# EAGLE board TestBoard (EAGLE 9.1.3)
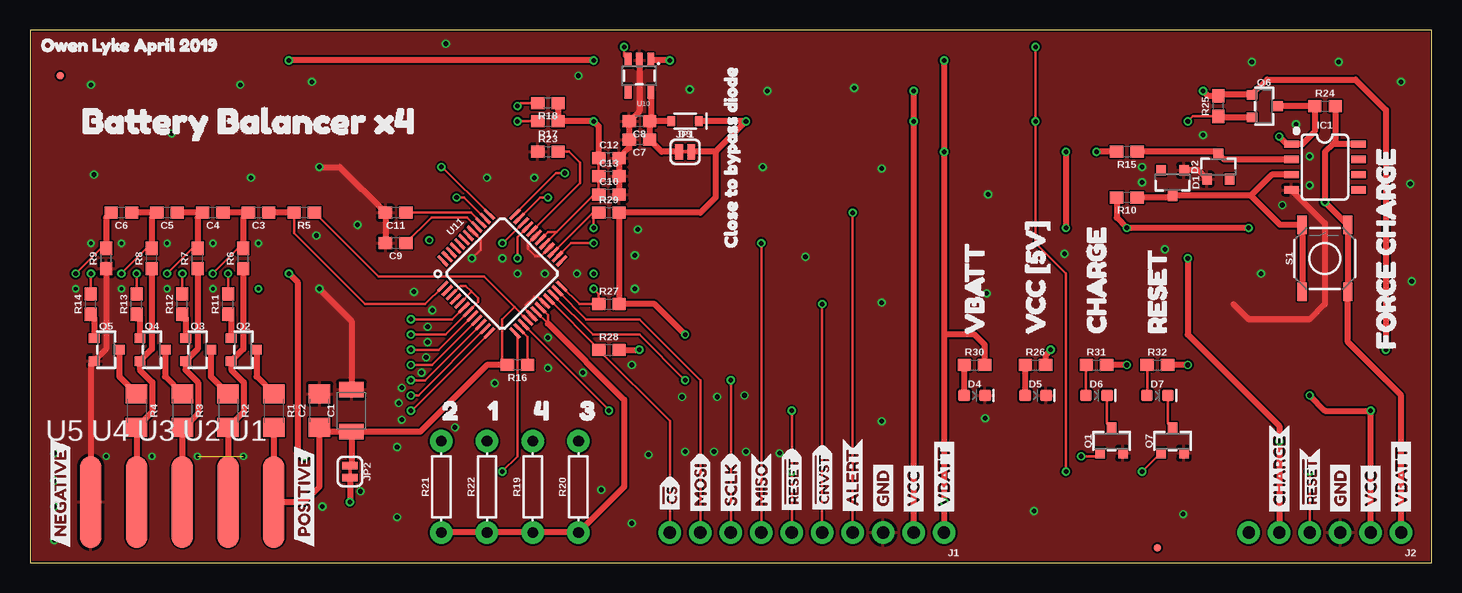
[diagram p0: board, top side]
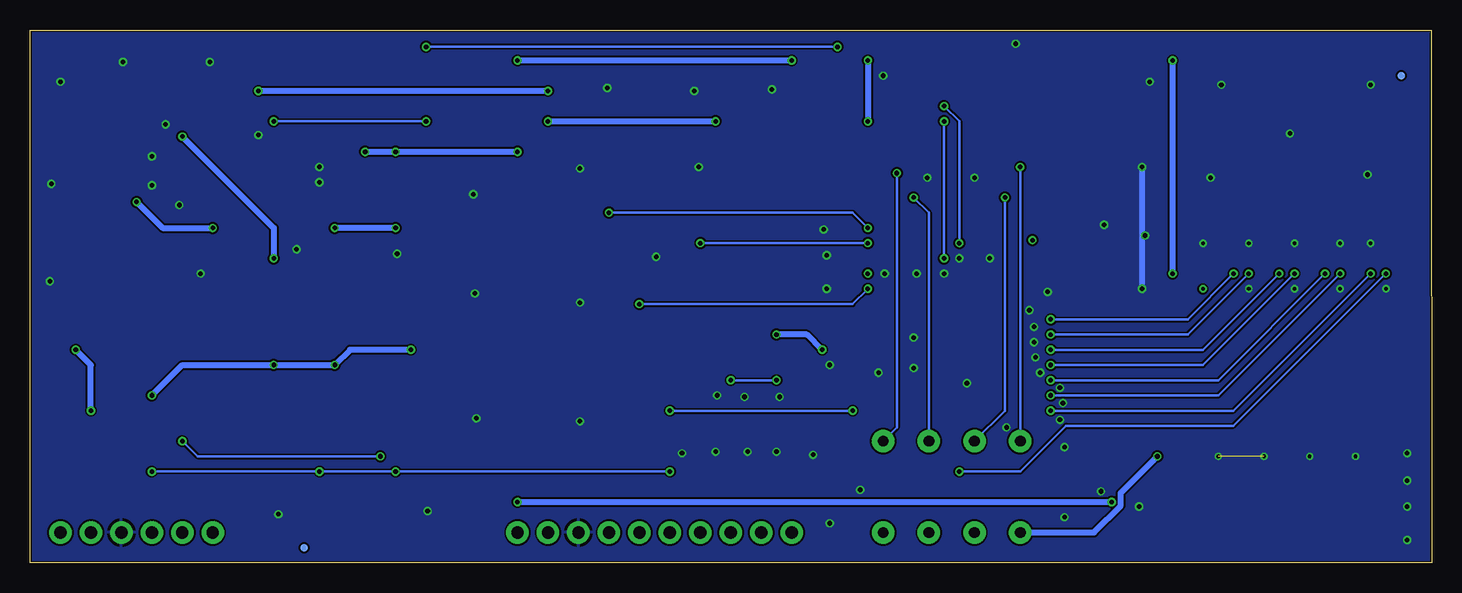
[diagram p1: board, bottom side, seen from below]

Size 116.84 x 44.45 mm. Coordinates in mm from the lower left corner, seen from the top.
Outline: 0,0 116.84,0 116.84,44.45 0.01,44.45 0,0
Copper layers (1*16): Top 0.035mm / dielectric 1.5mm / Bottom 0.035mm
Design rules "SparkFun-2-layer-PCBWay-LIMIT": minimum track width 6mil, minimum drill 0.3mm, track to track 6mil, track to pad 6mil, pad to pad 6mil, via to via 6mil, smd to smd 6mil, copper to edge 6mil, drill to drill 6mil, minimum pad ring 6mil, minimum via ring 6mil, stop-mask expansion 4mil, vias tented up to drill 25mil, thermal gap 10mil

## Footprints (pad centres in the part's own frame; a part is rotated, then mirrored left to right if it is on the bottom)
1210 = smd 1.27 x 2.06: 1 -1.755,0; 2 1.755,0
1206 = smd 1.6 x 1.8: 1 -1.4,0; 2 1.4,0
0603 = smd 1.1 x 1: 1 -0.85,0; 2 0.85,0
SOT23-3 = smd 0.8 x 0.9: 1 -0.95,-1; 2 0.95,-1; 3 0,1.1
SOD-323 = smd 0.63 x 0.83: A 1.15,0; C -1.15,0
LED-0603 = smd 1 x 1: A -0.877,0; C 0.877,0
FIDUCIAL-MICRO = smd 0.635 x 0.635: 1 0,0
SO08 = smd 0.6 x 1.2: 1 -1.905,-2.8; 2 -0.635,-2.8; 3 0.635,-2.8; 4 1.905,-2.8; 5 1.905,2.8; 6 0.635,2.8; 7 -0.635,2.8; 8 -1.905,2.8
1X10_NO_SILK = drill 1.016 pad 1.88: 1 0,0; 2 2.54,0; 3 5.08,0; 4 7.62,0; 5 10.16,0; 6 12.7,0; 7 15.24,0; 8 17.78,0; 9 20.32,0; 10 22.86,0
1X06_NO_SILK = drill 1.016 pad 1.88: 1 0,0; 2 2.54,0; 3 5.08,0; 4 7.62,0; 5 10.16,0; 6 12.7,0
SMT-JUMPER_2_NC_TRACE_SILK = smd 0.635 x 1.27: 1 -0.508,0; 2 0.508,0
AXIAL-0.3 = drill 0.9 pad 1.88: P$1 -3.81,0; P$2 3.81,0
TACTILE_SWITCH_SMD_5.2MM = smd 1.524 x 0.762: 1 -2.794,1.905; 2 2.794,1.905; 3 -2.794,-1.905; 4 2.794,-1.905
1X01_SMD_0.1IN = smd 1.778 x 7.62: 1 0,0
SOT23-5 = smd 0.55 x 1.2: 1 -0.95,-1.3; 2 0,-1.3; 3 0.95,-1.3; 4 0.95,1.3; 5 -0.95,1.3
LQFP-48 = smd 0.254 x 1.143: 1 -2.75,-4.25; 2 -2.25,-4.25; 3 -1.75,-4.25; 4 -1.25,-4.25; 5 -0.75,-4.25; 6 -0.25,-4.25; 7 0.25,-4.25; 8 0.75,-4.25; 9 1.25,-4.25; 10 1.75,-4.25; 11 2.25,-4.25; 12 2.75,-4.25; 25 2.75,4.25; 26 2.25,4.25; 27 1.75,4.25; 28 1.25,4.25; 29 0.75,4.25; 30 0.25,4.25; 31 -0.25,4.25; 32 -0.75,4.25; 33 -1.25,4.25; 34 -1.75,4.25; 35 -2.25,4.25; 36 -2.75,4.25 | smd 1.143 x 0.254: 13 4.25,-2.75; 14 4.25,-2.25; 15 4.25,-1.75; 16 4.25,-1.25; 17 4.25,-0.75; 18 4.25,-0.25; 19 4.25,0.25; 20 4.25,0.75; 21 4.25,1.25; 22 4.25,1.75; 23 4.25,2.25; 24 4.25,2.75; 37 -4.25,2.75; 38 -4.25,2.25; 39 -4.25,1.75; 40 -4.25,1.25; 41 -4.25,0.75; 42 -4.25,0.25; 43 -4.25,-0.25; 44 -4.25,-0.75; 45 -4.25,-1.25; 46 -4.25,-1.75; 47 -4.25,-2.25; 48 -4.25,-2.75

## Placement (x,y rotation side)
C1  10uF  [1210]  26.8,12.7 90 top
C2  1.0uF  [1206]  24.13,12.7 90 top
C3  0.1uF  [0603]  19.05,29.21 180 top
C4  0.1uF  [0603]  15.24,29.21 180 top
C5  0.1uF  [0603]  11.43,29.21 180 top
C6  0.1uF  [0603]  7.62,29.21 180 top
C7  1.0uF  [0603]  50.8,35.31 180 top
C8  0.1uF  [0603]  50.8,36.83 180 top
C9  1.0uF  [0603]  30.48,26.67 180 top
C10  0.1uF  [0603]  48.26,30.73 0 top
C11  1.0uF  [0603]  30.48,29.21 180 top
C12  0.1uF  [0603]  48.26,33.78 0 top
C13  1.0uF  [0603]  48.26,32.26 0 top
D1  MATCH  [SOT23-3]  95.25,31.75 180 top
D2  TH  [SOT23-3]  99.06,33.02 0 top
D3  3A/10V/280mV  [SOD-323]  54.61,36.83 180 top
D4  BLUE  [LED-0603]  78.74,13.97 0 top
D5  BLUE  [LED-0603]  83.82,13.97 0 top
D6  BLUE  [LED-0603]  88.9,13.97 0 top
D7  BLUE  [LED-0603]  93.98,13.97 0 top
FD1  FIDUCIALUFIDUCIAL  [FIDUCIAL-MICRO]  2.54,40.64 0 top
FD2  FIDUCIALUFIDUCIAL  [FIDUCIAL-MICRO]  2.54,40.64 0 bottom
FD3  FIDUCIALUFIDUCIAL  [FIDUCIAL-MICRO]  93.98,1.27 0 top
FD4  FIDUCIALUFIDUCIAL  [FIDUCIAL-MICRO]  93.98,1.27 0 bottom
FRAME1  FRAME-LEDGER  [CREATIVE_COMMONS]  -80.01,31.75 0 top  (outside the outline)
IC1  OP-AMP  [SO08]  107.95,33.02 270 top
J1  [1X10_NO_SILK]  76.2,2.54 180 top
J2  [1X06_NO_SILK]  114.3,2.54 180 top
JP1  VCC  [SMT-JUMPER_2_NC_TRACE_SILK]  54.61,34.29 0 top
JP2  RPP_BYP  [SMT-JUMPER_2_NC_TRACE_SILK]  26.67,7.62 270 top
Q1  [SOT23-3]  90.17,10.16 0 top
Q2  [SOT23-3]  17.78,17.78 270 top
Q3  [SOT23-3]  13.97,17.78 270 top
Q4  [SOT23-3]  10.16,17.78 270 top
Q5  [SOT23-3]  6.35,17.78 270 top
Q6  [SOT23-3]  102.87,38.1 270 top
Q7  [SOT23-3]  95.25,10.16 0 top
R1  10  [1206]  20.32,12.7 270 top
R2  10  [1206]  16.51,12.7 270 top
R3  10  [1206]  12.7,12.7 270 top
R4  10  [1206]  8.89,12.7 270 top
R5  10k  [0603]  22.86,29.21 180 top
R6  10k  [0603]  17.78,25.4 90 top
R7  10k  [0603]  13.97,25.4 90 top
R8  10k  [0603]  10.16,25.4 90 top
R9  10k  [0603]  6.35,25.4 90 top
R10  1M  [0603]  91.44,30.48 180 top
R11  10k  [0603]  16.51,21.59 90 top
R12  10k  [0603]  12.7,21.59 90 top
R13  10k  [0603]  8.89,21.59 90 top
R14  10k  [0603]  5.08,21.59 90 top
R15  330k  [0603]  91.44,34.29 180 top
R16  10k  [0603]  40.64,16.51 180 top
R17  10k  [0603]  43.18,36.83 180 top
R18  10k  [0603]  43.18,38.35 180 top
R19  DNP  [AXIAL-0.3]  41.91,6.35 90 top
R20  DNP  [AXIAL-0.3]  45.72,6.35 90 top
R21  DNP  [AXIAL-0.3]  34.29,6.35 90 top
R22  DNP  [AXIAL-0.3]  38.1,6.35 90 top
R23  10k  [0603]  43.18,34.29 0 top
R24  10k  [0603]  107.95,38.1 0 top
R25  10k  [0603]  99.06,38.1 90 top
R26  1k  [0603]  83.82,16.51 0 top
R27  10k  [0603]  48.26,21.59 0 top
R28  10k  [0603]  48.26,17.78 0 top
R29  10k  [0603]  48.26,29.21 0 top
R30  10k  [0603]  78.74,16.51 0 top
R31  1k  [0603]  88.9,16.51 0 top
R32  1k  [0603]  93.98,16.51 0 top
S1  Force Charge  [TACTILE_SWITCH_SMD_5.2MM]  107.95,25.4 90 top
U1  TAP_POINT  [1X01_SMD_0.1IN]  20.32,5.08 0 top
U2  TAP_POINT  [1X01_SMD_0.1IN]  16.51,5.08 0 top
U3  TAP_POINT  [1X01_SMD_0.1IN]  12.7,5.08 0 top
U4  TAP_POINT  [1X01_SMD_0.1IN]  8.89,5.08 0 top
U5  TAP_POINT  [1X01_SMD_0.1IN]  5.08,5.08 0 top
U10  MCP1755  [SOT23-5]  50.8,40.64 180 top
U11  AD7280A  [LQFP-48]  39.37,24.13 315 top
U$1  [#CNVST5]  66.04,3.81 90 top
U$2  [#CS3]  53.34,3.81 90 top
U$3  [#RESET4]  63.5,3.81 90 top
U$4  [#RESET11]  106.68,3.81 90 top
U$5  [ALERT6]  68.58,3.81 90 top
U$6  [GND7]  71.12,3.81 90 top
U$7  [GND7]  109.22,3.81 90 top
U$8  [CHARGE10]  104.14,3.81 90 top
U$9  [MISO2]  60.96,3.81 90 top
U$10  [MOSI1]  55.88,3.81 90 top
U$11  [SCLK0]  58.42,3.81 90 top
U$12  [VCC8]  73.66,3.81 90 top
U$13  [VBATT9]  76.2,3.81 90 top
U$14  [VBATT9]  114.3,3.81 90 top
U$15  [VCC8]  111.76,3.81 90 top
U$16  [CLOSE_TO_BYPASS_DIODE12]  58.42,25.4 90 top
U$17  [NEGATIVE0]  2.54,1.27 90 top
U$18  [POSITIVE1]  22.86,1.27 90 top
U$19  [CHARGE14]  88.9,17.78 90 top
U$20  [RESET15]  93.98,17.78 90 top
U$21  [VBATT12]  78.74,17.78 90 top
U$22  [VCC_#5V#13]  83.82,17.78 90 top
U$23  [116]  36.83,12.7 0 top
U$24  [217]  33.02,12.7 0 top
U$25  [318]  44.45,12.7 0 top
U$26  [419]  40.64,12.7 0 top
U$27  [OWEN_LYKE_APRIL_201921]  0,43.18 0 top
U$28  [FORCE_CHARGE20]  113.03,16.51 90 top
U$29  [BATTERY_BALANCER_X421]  2.54,36.83 0 top

## Library data of the parts
C1 = SparkFun-Capacitors; PROD_ID: CAP-09824
C2 = SparkFun-Capacitors; PROD_ID: CAP-09822
C3-C6 C8 C10 C12 = SparkFun-Capacitors; PROD_ID: CAP-08604
C7 C9 C11 C13 = SparkFun-Capacitors; PROD_ID: CAP-13930
D1 D2 = SparkFun-DiscreteSemi; PROD_ID: DIO-14123
D3 = SparkFun-DiscreteSemi; PROD_ID: DIO-14072
D4-D7 = SparkFun-LED; PROD_ID: DIO-08575
FD1-FD4 FRAME1 = SparkFun-Aesthetics
IC1 = SparkFun-IC-Amplifiers; PROD_ID: NA-XXXXX
J1 = SparkFun-Connectors; PROD_ID: CONN-11563
J2 = SparkFun-Connectors
JP1 JP2 = SparkFun-Jumpers
Q1-Q7 = MTAES_V2_UniqueParts
R1-R4 = SparkFun-Resistors; PROD_ID: RES-08705
R5-R9 R11-R14 R16-R18 R23-R25 R27-R30 = SparkFun-Resistors; PROD_ID: RES-00824
R10 = SparkFun-Resistors; PROD_ID: RES-07868
R15 = SparkFun-Resistors; PROD_ID: RES-08968
R19-R22 U1-U5 U10 U11 = BBLib
R26 R31 R32 = SparkFun-Resistors; PROD_ID: RES-07856
S1 = SparkFun-Switches; PROD_ID: SWCH-14139
U$1-U$16 U$19-U$29 = buzzard_labels_test
U$17 U$18 = buzzard_labels_0

## Nets
5V: C7.1 C8.1 D3.A JP1.1 U10.5
!CS: J1.10 R28.1 U11.21
!CVNST: J1.5 R27.1 U11.24
ALERT: J1.4 R29.1 U11.27
CHARGE: IC1.1 J2.5 Q1.1 Q6.3 R24.1
GND: C1.2 C2.2 C7.2 C8.2 C9.2 C10.2 C11.2 C12.2 C13.2 D1.1 D2.1 D4.C D5.C IC1.4 J1.3 J2.3 Q1.2 Q5.2 Q7.2 R9.1 R23.1 U5.1 U10.2 U11.17 U11.20 U11.28 U11.31 U11.41
MISO: J1.7 U11.26
MOSI: J1.9 U11.23
N$2: D7.C Q7.3
N$3: D6.C Q1.3
N$5: Q2.3 R1.1
N$6: Q2.2 R2.2 R6.1 U2.1
N$7: Q3.3 R2.1
N$8: Q3.2 R3.2 R7.1 U3.1
N$9: Q4.3 R3.1
N$10: Q4.2 R4.2 R8.1 U4.1
N$11: Q5.3 R4.1
N$12: Q2.1 R11.1
N$13: Q3.1 R12.1
N$14: R16.1 U11.14
N$15: Q4.1 R13.1
N$16: Q5.1 R14.1
N$17: C6.2 R9.2 U11.13
N$18: R14.2 U11.12
N$19: C5.2 C6.1 R8.2 U11.11
N$20: R13.2 U11.10
N$21: C4.2 C5.1 R7.2 U11.9
N$22: R12.2 U11.8
N$23: R22.P$2 U11.38
N$24: R11.2 U11.6
N$25: C3.1 R5.2 U11.1
N$26: C3.2 C4.1 R6.2 U11.3 U11.5 U11.7
N$27: C9.1 U11.40
N$28: R17.2 U11.33
N$29: C11.1 U11.39
N$30: R23.2 U11.32
N$31: R18.2 U11.34
N$32: R21.P$2 U11.37
N$33: R20.P$2 U11.36
N$34: R19.P$2 U11.35
N$35: D4.A R30.1
N$36: J2.6
N$37: D5.A R26.1
N$38: D6.A R31.1
N$39: D7.A R32.1
N$40: D1.3 IC1.3 R10.1 S1.1 S1.2
N$41: D2.3 IC1.2 R15.1
RESET: J1.6 J2.4 Q6.2 Q7.1 R25.1 U10.3 U11.15
SCLK: J1.8 U11.22
V_BATT: IC1.8 J1.1 J2.1 JP2.2 R10.2 R15.2 R24.2 R30.2 S1.3 S1.4 U10.1
V_RAW: C1.1 C2.1 JP2.1 R1.2 R5.1 R16.2 U1.1 U11.16
VCC: D3.C J1.2 J2.2 JP1.2 Q6.1 R25.2 R26.2 R27.2 R28.2 R29.2 R31.2 R32.2
VREG: C10.1 C12.1 C13.1 R17.1 R18.1 R19.P$1 R20.P$1 R21.P$1 R22.P$1 U11.18 U11.19 U11.29 U11.30

## Tracks (layer width: path | path; a pad name or v marks a point on that pad's centre or on a via)
5V
  Top 0.508: D3.A C8.1 | JP1.1 52.67,34.29 C7.1 C8.1 | U10.5 51.75,36.93 C8.1
!CS
  Top 0.203: U11.21 47.41,17.86 R28.1 53.34,11.85 J1.10
!CVNST  (via drill 0.38)
  Top 0.203: U11.24 45.8,21.59 R27.1 47.41,22.44 v46.99,22.86 | v66.04,21.59 J1.5
  Bottom 0.203: v66.04,21.59 48.26,21.59 v46.99,22.86
ALERT  (via drill 0.38)
  Top 0.203: U11.27 46.92,29.21 R29.1 46.99,28.79 v46.99,27.94 | v68.58,29.21 J1.4
  Bottom 0.203: v68.58,29.21 48.26,29.21 v46.99,27.94
CHARGE  (via drill 0.38)
  Top 0.203: Q1.1 88.95,8.89 v87.63,8.89
  Top 0.508: Q6.3 R24.1 107.1,35.98 106.05,34.92 IC1.1 104.78,34.92 v104.14,35.56 | v96.52,25.4 96.52,19.05 104.14,11.43 v104.14,10.16 J2.5
  Bottom 0.203: v104.14,10.16 102.87,8.89 v87.63,8.89
  Bottom 0.508: v104.14,35.56 96.52,27.94 v96.52,25.4
GND  (via drill 0.3, 0.38)  (1 unrouted)
  Top 0.203: U11.17 41.84,20.64 41.32,21.16 41.32,21.5 42.01,22.18 42.34,22.18 42.86,21.66 U11.20 | U11.28 42.6,25.6 42.09,25.6 41.53,26.16 41.53,26.64 U11.31 | U11.41 36.9,27.62 37.54,26.98 37.54,26.11 v36.83,25.4
  Top 0.508: U5.1 5.08,16.56 Q5.2 6.35,17.83 R9.1 | U10.2 50.8,37.68 C8.2 C7.2 49.95,34.62 C12.2 C13.2 C10.2 | D1.1 97.38,32.75 D2.1 | IC1.4 107.95,28.32 107.95,21.59 106.68,20.32 101.6,20.32 100.33,21.59 | C1.2 26.8,20.19 v24.13,22.86 | v24.13,33.02 25.82,33.02 C11.2 C9.2
  Bottom 0.508: v24.13,22.86 v24.13,33.02
  other vias: 42.93,24.13 40.64,24.13 39.37,25.4 92.71,33.02 92.71,31.75 45.59,24.13 23.88,27.3 32,22.61 33.53,21.08 33.15,19.68 33.15,18.41 33.02,17.14 32.64,15.88 30.99,14.61 30.73,13.34 30.99,11.94 30.61,9.65 27.56,5.97 47.62,6.1 35.43,11.3 38.73,14.99 43.18,16.26 51.56,9.02 54.61,9.27 57.02,9.27 59.69,9.27 62.48,9.14 57.28,13.84 59.56,13.97 54.36,13.84 61.09,33.02 70.99,32.89 70.99,21.72 70.99,11.81 79.63,12.06 79.76,22.48 79.88,30.73 38.1,32.13 42.04,32.13 50.67,27.81 27.3,28.19 11.81,35.81 17.53,39.88 18.41,32.13 5.33,32.38 5.08,39.88 2.03,9.14 2.03,6.86 2.03,4.7 2.03,1.91 24.38,4.7 30.61,3.81 50.16,3.3 50.16,16.51 46.1,15.88 43.18,18.8 50.42,25.65 50.42,22.86 64.64,25.53 34.67,43.31 23.5,40.13 45.72,40.64 104.39,29.84 106.68,31.5 106.68,33.91 97.79,35.69 105.54,36.58 115.19,23.5 102.62,24.13 115.06,31.62 114.3,40.13 109.09,41.78 101.85,41.78 96.14,4.06 83.69,4.32 86.23,25.78 94.61,26.16 68.71,39.62 61.47,39.37 54.99,39.5 5.08,26.67 7.62,26.67 11.43,26.67 15.24,26.67 19.05,26.67 3.81,22.86 7.62,22.86 11.43,22.86 15.24,22.86 6.35,8.89 10.16,8.89 13.97,8.89 17.78,8.89
  pour Top (isolate 0.152): 0,0 0,44.45 116.84,44.45 116.84,0
  pour Bottom (isolate 0.152): 0,0 0,44.45 116.84,44.45 116.84,0
MISO  (via drill 0.38)
  Top 0.203: U11.26 45.09,26.67 v46.99,26.67 | v60.96,26.67 J1.7
  Bottom 0.203: v60.96,26.67 v46.99,26.67
MOSI
  Top 0.203: U11.23 46.36,20.32 50.8,20.32 55.88,15.24 J1.9
N$1  (via drill 0.38)
  other vias: 33.27,26.92
N$2
  Top 0.203: D7.C 94.86,11.65 Q7.3
N$3
  Top 0.203: Q1.3 89.78,11.65 D6.C
N$4  (via drill 0.38)
  other vias: 46.99,24.13
N$5
  Top 0.508: Q2.3 18.88,15.54 R1.1
N$6
  Top 0.508: U2.1 R2.2 17.82,12.61 17.82,15.07 16.78,16.11 Q2.2 17.78,17.83 R6.1
N$7
  Top 0.508: Q3.3 15.07,15.54 R2.1
N$8
  Top 0.508: 12.7,11.18 U3.1 | R3.2 12.7,11.18 | 12.7,11.18 14.01,12.48 14.01,15.07 12.97,16.11 Q3.2 13.97,17.83 R7.1
N$9
  Top 0.508: Q4.3 11.26,15.54 R3.1
N$10
  Top 0.508: U4.1 R4.2 10.2,12.61 10.2,15.07 9.16,16.11 Q4.2 10.16,17.83 R8.1
N$11
  Top 0.508: Q5.3 7.45,15.54 R4.1
N$12
  Top 0.508: Q2.1 16.78,20.47 R11.1
N$13
  Top 0.508: Q3.1 12.97,20.47 R12.1
N$14
  Top 0.203: U11.14 41.49,18.83 R16.1
N$15
  Top 0.508: Q4.1 9.16,20.47 R13.1
N$16
  Top 0.508: Q5.1 5.35,20.47 R14.1
N$17  (via drill 0.38)
  Top 0.203: R9.2 5.93,26.25 v3.81,24.13 | U11.13 40.64,18.97 40.64,8.89 v39.37,7.62
  Top 0.508: R9.2 6.35,28.79 C6.2
  Bottom 0.203: v3.81,24.13 16.51,11.43 30.48,11.43 34.29,7.62 v39.37,7.62
N$18  (via drill 0.38)
  Top 0.203: v5.08,24.13 R14.2 | v31.75,12.7 31.83,12.7 U11.12
  Bottom 0.203: v5.08,24.13 16.51,12.7 v31.75,12.7
N$19  (via drill 0.38)
  Top 0.203: U11.11 32.39,13.97 v31.75,13.97 | R8.2 9.74,26.25 v7.62,24.13
  Top 0.508: R8.2 10.16,28.79 C5.2 C6.1
  Bottom 0.203: v31.75,13.97 17.78,13.97 v7.62,24.13
N$20  (via drill 0.38)
  Top 0.203: v8.89,24.13 R13.2 | v31.75,15.24 32.95,15.24 U11.10
  Bottom 0.203: v8.89,24.13 17.78,15.24 v31.75,15.24
N$21  (via drill 0.38)
  Top 0.203: v31.75,16.51 33.52,16.51 U11.9 | v11.43,24.13 13.55,26.25 R7.2
  Top 0.508: R7.2 13.97,28.79 C4.2 C5.1
  Bottom 0.203: v11.43,24.13 19.05,16.51 v31.75,16.51
N$22  (via drill 0.38)
  Top 0.203: v12.7,24.13 R12.2 | v31.75,17.78 34.08,17.78 U11.8
  Bottom 0.203: v12.7,24.13 19.05,17.78 v31.75,17.78
N$23  (via drill 0.38)
  Top 0.203: v35.56,30.48 36.2,30.48 U11.38
  Bottom 0.203: R22.P$2 35.56,12.7 v35.56,30.48
N$24  (via drill 0.38)
  Top 0.203: v16.51,24.13 R11.2 | v31.75,20.32 35.21,20.32 U11.6
  Bottom 0.203: v16.51,24.13 20.32,20.32 v31.75,20.32
N$25
  Top 0.203: U11.1 32.94,21.59 27.94,21.59 22.01,27.52 R5.2
  Top 0.508: R5.2 C3.1
N$26  (via drill 0.38)
  Top 0.203: v31.75,19.05 34.64,19.05 U11.7 37.34,21.74 37.34,22.1 36.77,22.67 | v15.24,24.13 17.36,26.25 R6.2 | 36.77,22.67 36.32,23.11 35.88,23.11 U11.3 | U11.5 36.77,22.59 36.77,22.67
  Top 0.508: R6.2 17.78,28.79 17.99,29 | C3.2 17.99,29 | C4.1 17.78,29.21 17.99,29
  Bottom 0.203: v15.24,24.13 20.32,19.05 v31.75,19.05
N$27
  Top 0.203: U11.40 37.21,28.02 36.42,28.8 36.41,28.82 33.48,28.82 C9.1
N$28  (via drill 0.38)
  Top 0.203: U11.33 40.64,27.17 v40.64,25.4 | R17.2 v40.64,36.83
  Bottom 0.203: v40.64,36.83 v40.64,25.4
N$29
  Top 0.203: U11.39 36.77,29.21 C11.1
N$30
  Top 0.203: U11.32 45.85,31.67 45.85,33.4 44.96,34.29 R23.2
N$31  (via drill 0.38)
  Top 0.203: U11.34 39.44,26.67 v39.37,26.67 | R18.2 40.89,38.35 v40.64,38.1
  Bottom 0.203: v40.64,38.1 39.37,36.83 v39.37,26.67
N$32  (via drill 0.38)
  Top 0.203: U11.37 34.37,33.02 v34.29,33.02
  Bottom 0.203: v34.29,33.02 R21.P$2
N$33  (via drill 0.38)
  Top 0.203: U11.36 43.86,32.51 v44.58,32.51
  Bottom 0.203: v44.58,32.51 44.58,11.3 R20.P$2
N$34  (via drill 0.38)
  Top 0.203: U11.35 42.54,30.48 v43.18,30.48
  Bottom 0.203: R19.P$2 41.91,29.21 v43.18,30.48
N$35
  Top 0.508: R30.1 77.86,16.48 D4.A
N$37
  Top 0.508: R26.1 82.94,16.48 D5.A
N$38
  Top 0.203: R31.1 88.02,16.48 D6.A
N$39
  Top 0.203: R32.1 93.13,14 D7.A
N$40
  Top 0.508: 101.77,30.65 D1.3 95.08,30.48 R10.1 | IC1.3 103.5,32.38 101.77,30.65 | 101.77,30.65 104.23,28.19 S1.2 S1.1
N$41
  Top 0.508: IC1.2 99.53,33.66 D2.3 98.89,34.29 R15.1
N$49  (via drill 0.3)
  other vias: 19.05,22.86
RESET  (via drill 0.38)
  Top 0.203: U11.15 48.26,12.77 v48.26,12.7 | v63.5,12.7 v63.5,7.62 J1.6 | v106.68,7.62 J2.4 | R25.1 96.94,37.25 v96.52,36.83 | v86.36,7.62 86.36,24.13 83.82,26.67 v83.82,36.83 v83.82,43.04 | U10.3 49.53,42.26 v49.53,43.04 | Q7.1 94.25,9.16 v92.71,7.62
  Top 0.508: Q6.2 99.16,37.15 R25.1
  Bottom 0.203: v63.5,12.7 v48.26,12.7 | v63.5,7.62 v86.36,7.62 v92.71,7.62 v106.68,7.62 | v96.52,36.83 v83.82,36.83 | v49.53,43.04 v83.82,43.04
SCLK  (via drill 0.38)
  Top 0.203: U11.22 46.92,19.05 50.8,19.05 v54.61,15.24 | v58.42,15.24 J1.8
  Bottom 0.203: v58.42,15.24 v54.61,15.24
V_BATT  (via drill 0.38)
  Top 0.508: IC1.8 108.58,34.92 | 108.58,34.92 107.95,34.29 v107.95,30.1 S1.4 S1.3 109.86,18.41 114.3,13.97 J2.1 | R10.2 90.59,28.79 v91.44,27.94 v101.6,27.94 | R24.2 108.8,35.14 108.58,34.92 | JP2.2 v26.67,5.08 | J1.1 v76.2,5.08 76.2,19.05 | U10.1 53.31,41.94 v53.34,41.91 | v76.2,41.91 v76.2,34.29 76.2,19.05 | R15.2 v88.9,34.29 | v86.36,34.29 v86.36,27.94 | R30.2 79.59,18.2 78.74,19.05 76.2,19.05
  Bottom 0.508: v101.6,27.94 105.79,27.94 v107.95,30.1 | v76.2,5.08 v26.67,5.08 | v76.2,41.91 v53.34,41.91 | v88.9,34.29 v86.36,34.29 v76.2,34.29 | v86.36,27.94 v91.44,27.94
V_RAW
  Top 0.203: R5.1 29.04,23.88 37.86,23.88 40.39,21.34 | U11.16 40.39,21.34 | R16.2 39.37,16.93 39.37,20.32 40.39,21.34
  Top 0.508: R1.2 U1.1 22.86,5.08 24.13,6.35 C2.1 24.48,10.95 C1.1 | C1.1 26.8,8.26 JP2.1 | C1.1 32.53,10.95 38.1,16.51 R16.2
VCC  (via drill 0.38)
  Top 0.508: 57.15,34.29 JP1.2 | D3.C v59.69,36.83 57.15,34.29 | 57.15,34.29 57.15,30.48 55.88,29.21 R29.2 R27.2 52.07,21.59 v54.61,19.05 | J1.2 v73.66,36.83 v73.66,39.37 | v97.79,39.37 98.21,38.95 R25.2 99.16,39.05 Q6.1 103.14,40.32 110.49,40.32 113.03,37.78 v113.03,17.78 | R28.2 v50.8,17.78 | J2.2 v111.76,12.7 107.95,12.7 v106.68,13.97 | v91.44,16.51 R31.2 | v96.52,16.51 R32.2 | R26.2 84.67,17.36 v85.09,17.78
  Bottom 0.508: v73.66,36.83 v59.69,36.83 | v97.79,39.37 v73.66,39.37 | v50.8,17.78 52.07,19.05 v54.61,19.05 | v111.76,12.7 111.76,16.51 v113.03,17.78 | v106.68,13.97 104.14,16.51 v96.52,16.51 v91.44,16.51 90.17,17.78 v85.09,17.78
VREG  (via drill 0.38)
  Top 0.203: U11.18 43.18,19.97 43.18,20.67 U11.19 | C12.1 C13.1 C10.1 47.03,30.73 43.9,27.6 | 43.9,27.6 U11.29 | U11.30 43.19,27.6 43.9,27.6
  Top 0.508: R21.P$1 R22.P$1 R19.P$1 R20.P$1 49.53,6.35 49.53,13.62 43.18,19.97 | C12.1 47.41,36.41 v46.99,36.83 R17.1 R18.1 | v22.86,8.89 22.35,9.4 22.35,23.37 v21.59,24.13 | v46.99,41.91 v21.59,41.91
  Bottom 0.508: v22.86,8.89 25.92,5.83 25.92,4.77 28.15,2.54 R21.P$1 | v21.59,24.13 v21.59,41.91 | v46.99,41.91 v46.99,36.83